# EAGLE board 4 bit magniture comparator  (EAGLE 9.7.0)

Size 669.28 x 138.95 mm. Coordinates in mm from the lower left corner, seen from the top.
Outline: 0,0 669.28,0 669.28,138.95 0,138.95 0,0
Copper layers (1*16): Top 0.035mm / dielectric 1.5mm / Bottom 0.035mm
Design rules "default": minimum track width 6mil, minimum drill 0.35mm, track to track 6mil, track to pad 6mil, pad to pad 6mil, via to via 6mil, smd to smd 6mil, copper to edge 40mil, drill to drill 6mil, minimum pad ring 10mil, minimum via ring 8mil, stop-mask expansion 4mil, vias tented up to drill 0mil, thermal gap 10mil

## Footprints (pad centres in the part's own frame; a part is rotated, then mirrored left to right if it is on the bottom)
LEDRD254W60D565H860B = drill 0.981 pad 1.581: 1 -1.27,0; 2 1.27,0
BATTERY-GENERIC = drill 1.118 pad 3.15 octagon: + 2.54,0; - -2.54,0
RESAD1016W63L850D250B = drill 0.83 pad 1.43: 1 -5.08,0; 2 5.08,0
78B04ST = drill 0.8: 1 -3.81,-3.81; 2 -1.27,-3.81; 3 1.27,-3.81; 4 3.81,-3.81; 5 3.81,3.81; 6 1.27,3.81; 7 -1.27,3.81; 8 -3.81,3.81
DIP762W53P254L1969H508Q14B = drill 0.743 pad 1.343: 1 -3.81,7.62; 2 -3.81,5.08; 3 -3.81,2.54; 4 -3.81,0; 5 -3.81,-2.54; 6 -3.81,-5.08; 7 -3.81,-7.62; 8 3.81,-7.62; 9 3.81,-5.08; 10 3.81,-2.54; 11 3.81,0; 12 3.81,2.54; 13 3.81,5.08; 14 3.81,7.62

## Placement (x,y rotation side)
D1  RED  [LEDRD254W60D565H860B]  458.18,101.01 90 top
D2  RED  [LEDRD254W60D565H860B]  661.23,57.47 90 top
D3  RED  [LEDRD254W60D565H860B]  661.23,11.75 270 top
P1  BATTERYGENERIC  [BATTERY-GENERIC]  8.26,81.06 180 top
R1  1k  [RESAD1016W63L850D250B]  450.56,94.66 90 top
R2  1k  [RESAD1016W63L850D250B]  605.35,51.12 90 top
R3  1k  [RESAD1016W63L850D250B]  658.69,18.1 90 top
SW1  SPST-478B04ST  [78B04ST]  54.41,29.45 0 top
SW2  SPST-478B04ST  [78B04ST]  109.81,129.43 0 top
U1  74HC32_PDIP  [DIP762W53P254L1969H508Q14B]  597.73,34.61 90 top
U2  74HC04_PDIP  [DIP762W53P254L1969H508Q14B]  277.61,73.74 90 top
U3  74HC32_PDIP  [DIP762W53P254L1969H508Q14B]  640.91,34.61 90 top
U4  74HC04_PDIP  [DIP762W53P254L1969H508Q14B]  277.44,17.66 90 top
U5  74HC02_PDIP  [DIP762W53P254L1969H508Q14B]  397.22,78.15 90 top
U6  74HC08_PDIP  [DIP762W53P254L1969H508Q14B]  328.41,73.74 90 top
U7  74HC08_PDIP  [DIP762W53P254L1969H508Q14B]  328.24,17.66 90 top
U8  74HC08_PDIP  [DIP762W53P254L1969H508Q14B]  383.96,8.41 90 top
U9  74HC11_PDIP  [DIP762W53P254L1969H508Q14B]  422.06,8.41 90 top
U10  74HC21_PDIP  [DIP762W53P254L1969H508Q14B]  514.33,34.7 90 top
U11  74HC21_PDIP  [DIP762W53P254L1969H508Q14B]  442.94,78.15 90 top

## Library data of the parts
D1-D3 = Tinkercad; CATEGORY: Opto-Electronic; SUB-CATEGORY: LED; VALUE: LED_RED
P1 R1-R3 SW1 SW2 U1-U11 = Tinkercad

## Nets
D1_A: D1.1 R1.2
D2_A: D2.1 R2.2
D3_A: D3.1 R3.1
P1+: P1.+ SW1.5 SW1.6 SW1.7 SW1.8 SW2.5 SW2.6 SW2.7 SW2.8 U1.14 U2.14 U3.14 U4.14 U5.14 U6.14 U7.14 U8.14 U9.14 U10.14 U11.14
P1-: D1.2 D2.2 D3.2 P1.- U1.7 U2.7 U3.7 U4.7 U5.7 U6.7 U7.7 U8.7 U9.7 U10.7 U11.7
U1_1Y: U1.3 U1.10
U1_3Y: R2.1 U1.8
U1_4Y: U1.9 U1.11
U2_1A: SW2.2 U2.1 U6.4
U2_1Y: U2.2 U6.1
U2_2A: SW2.1 U2.3 U6.10
U2_2Y: U2.4 U6.13
U2_5A: SW2.3 U2.11 U7.10
U2_6A: SW2.4 U2.13 U7.4
U2_6Y: U2.12 U7.1
U3_3A: U3.3 U3.9
U3_3Y: R3.2 U3.8
U3_4Y: U3.10 U3.11
U4_1A: SW1.2 U4.1 U6.2
U4_1Y: U4.2 U6.5
U4_2A: SW1.1 U4.3 U6.12
U4_2Y: U4.4 U6.9
U4_5A: SW1.3 U4.11 U7.12
U4_5Y: U4.10 U7.9
U4_6A: SW1.4 U4.13 U7.2
U4_6Y: U4.12 U7.5
U5_2Y: U5.4 U11.9
U6_1Y: U5.8 U6.3 U8.12
U6_2Y: U5.9 U6.6 U8.10
U6_3Y: U3.13 U5.12 U6.8
U6_4Y: U1.13 U5.11 U6.11
U7_1Y: U5.6 U7.3 U10.13
U7_2Y: U5.5 U7.6 U10.1
U7_3Y: U5.2 U7.8 U9.11
U7_4B: U2.10 U7.13
U7_4Y: U5.3 U7.11 U9.13
U8_3Y: U3.12 U8.8
U8_4Y: U1.12 U8.11
U9_1Y: U1.1 U9.12
U9_3Y: U3.2 U9.8
U10_1B: U5.13 U8.9 U8.13 U9.1 U9.9 U10.2 U10.12 U11.13
U10_1C: U5.10 U9.2 U9.10 U10.4 U10.10 U11.12
U10_1D: U5.1 U10.5 U10.9 U11.10
U10_1Y: U3.1 U10.6
U10_2Y: U1.2 U10.8
U11_2Y: R1.1 U11.8

## Tracks (layer width: path | path; a pad name or v marks a point on that pad's centre or on a via)
D1_A  (1 unrouted)
D2_A  (1 unrouted)
D3_A  (1 unrouted)
P1+  (19 unrouted)
P1-  (14 unrouted)
U1_1Y  (1 unrouted)
U1_3Y  (1 unrouted)
U1_4Y  (1 unrouted)
U2_1A  (2 unrouted)
U2_1Y  (1 unrouted)
U2_2A  (2 unrouted)
U2_2Y  (1 unrouted)
U2_5A  (2 unrouted)
U2_6A  (2 unrouted)
U2_6Y  (1 unrouted)
U3_3A  (1 unrouted)
U3_3Y  (1 unrouted)
U3_4Y  (1 unrouted)
U4_1A  (2 unrouted)
U4_1Y  (1 unrouted)
U4_2A  (2 unrouted)
U4_2Y  (1 unrouted)
U4_5A  (2 unrouted)
U4_5Y  (1 unrouted)
U4_6A  (2 unrouted)
U4_6Y  (1 unrouted)
U5_2Y  (1 unrouted)
U6_1Y  (2 unrouted)
U6_2Y  (2 unrouted)
U6_3Y  (2 unrouted)
U6_4Y  (2 unrouted)
U7_1Y  (2 unrouted)
U7_2Y  (2 unrouted)
U7_3Y  (2 unrouted)
U7_4B  (1 unrouted)
U7_4Y  (2 unrouted)
U8_3Y  (1 unrouted)
U8_4Y  (1 unrouted)
U9_1Y  (1 unrouted)
U9_3Y  (1 unrouted)
U10_1B  (7 unrouted)
U10_1C  (5 unrouted)
U10_1D  (3 unrouted)
U10_1Y  (1 unrouted)
U10_2Y  (1 unrouted)
U11_2Y  (1 unrouted)